# Altium PCB Led_Master.PcbDoc
Units mm, origin at the board's own origin, x right, y up, seen from the top; angles counter-clockwise.
Board outline 94.2 x 75.26 mm, 2 copper layers (Top Layer, Bottom Layer); 77 components, 42 nets, 241 pads, 41 vias.
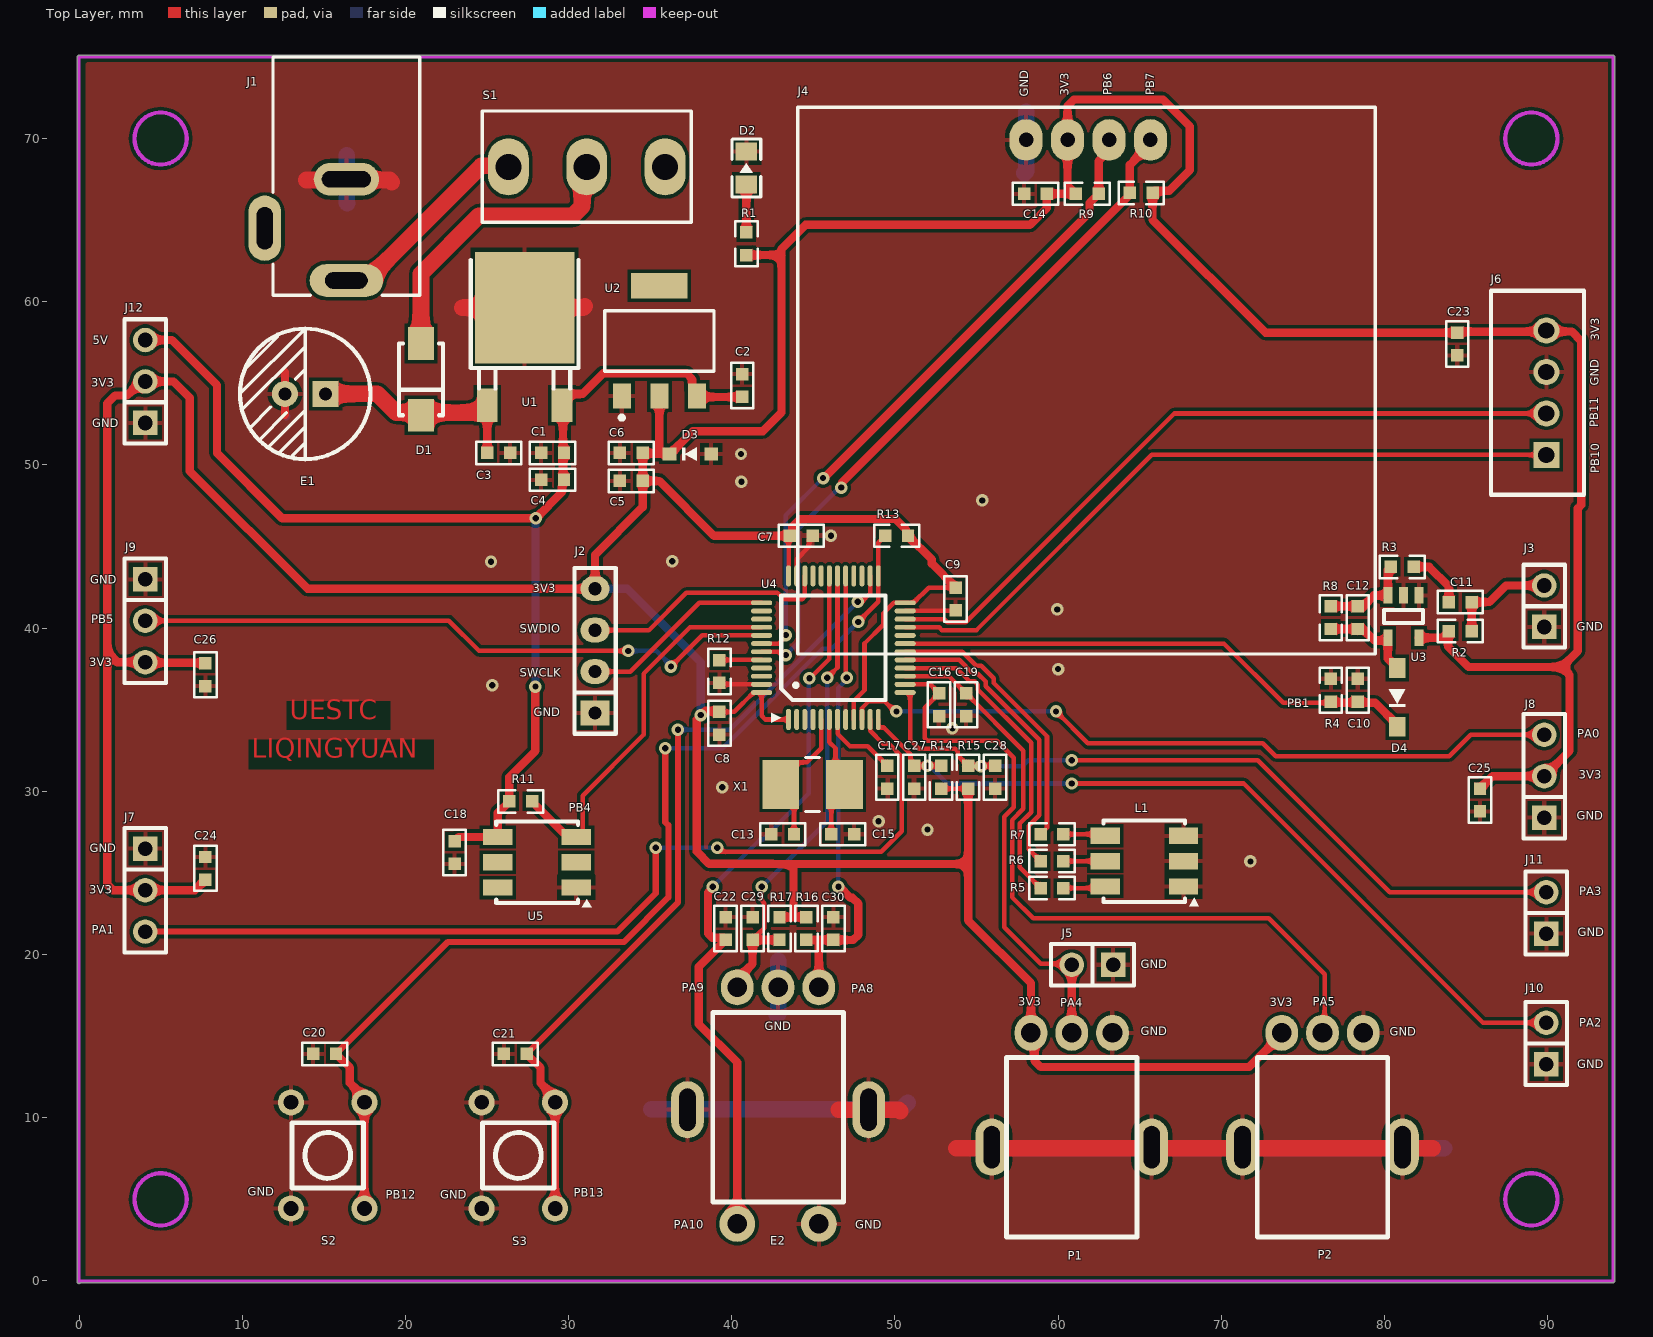
[diagram p0: Top Layer view]
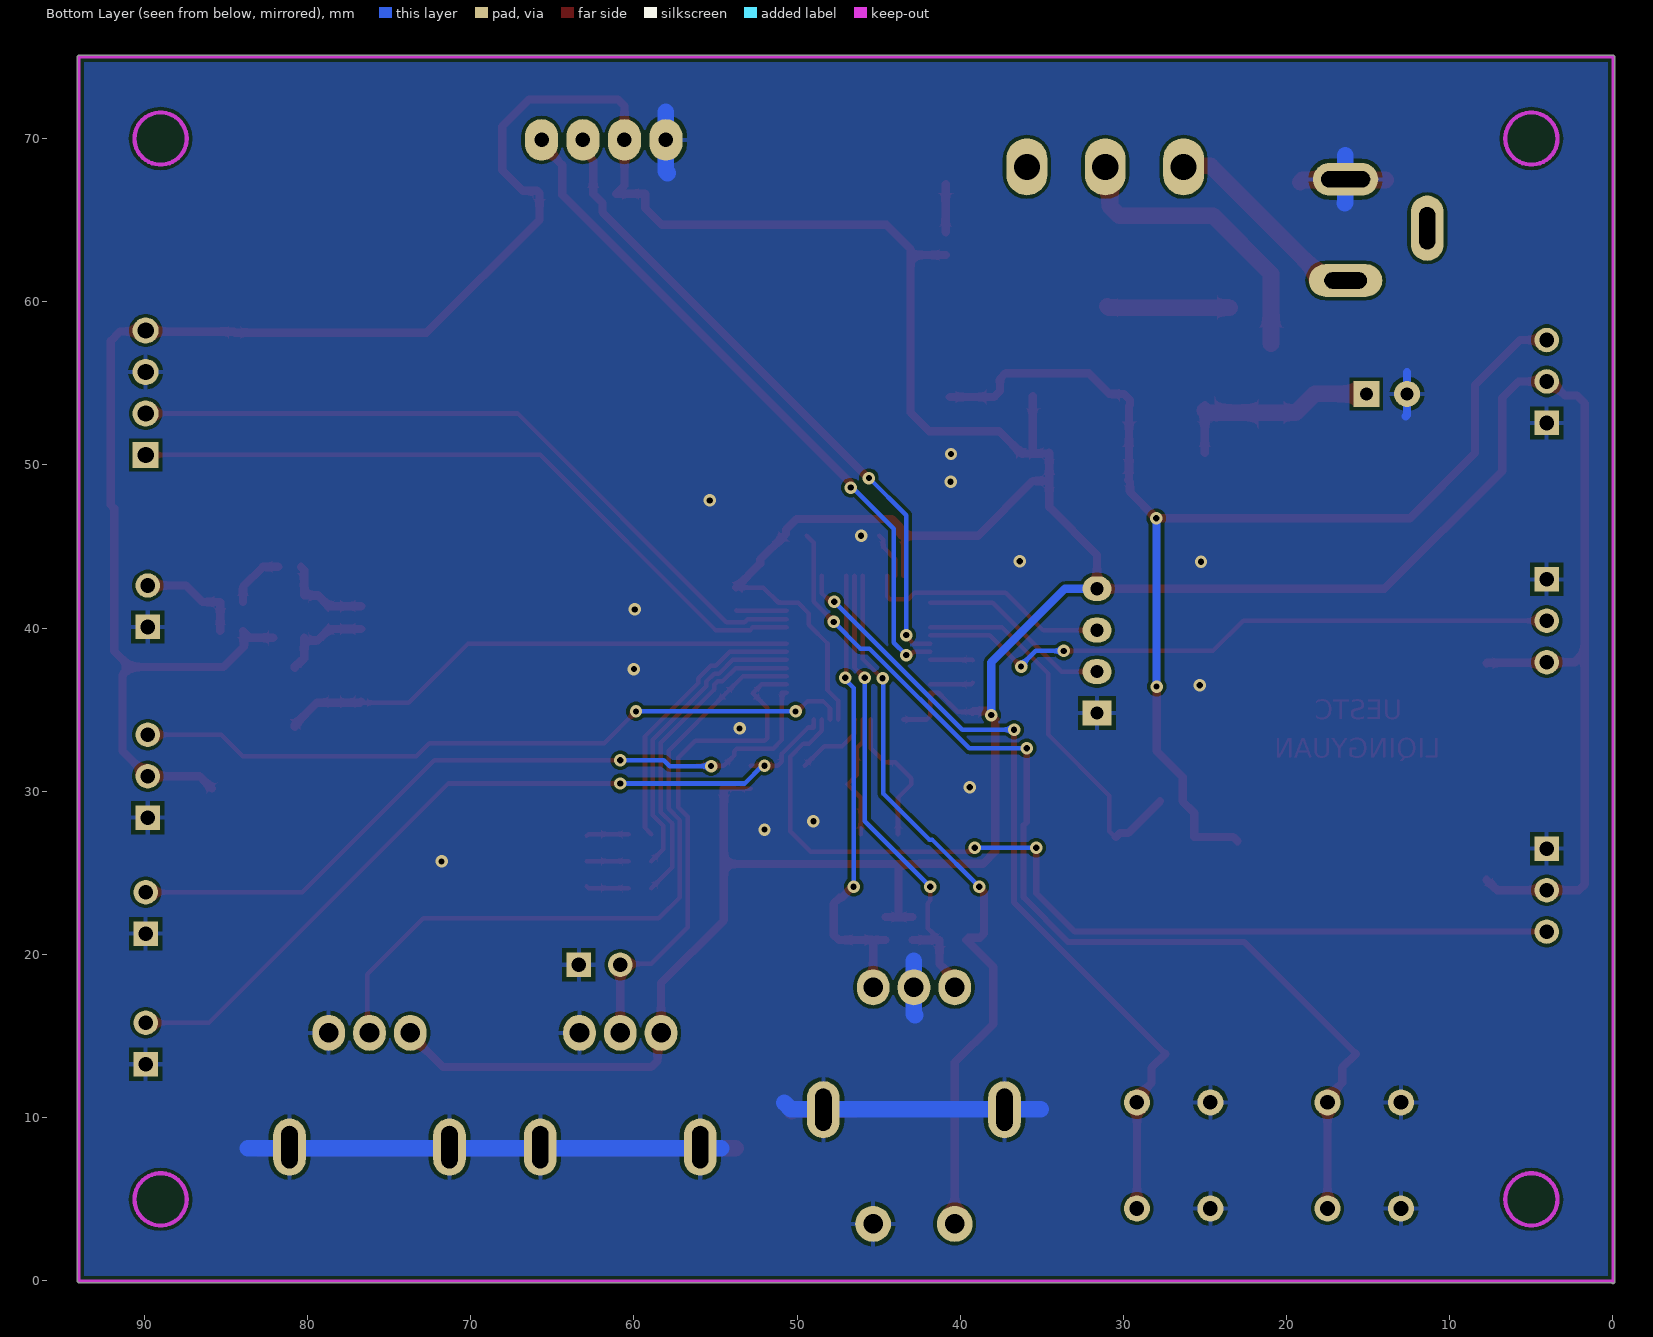
[diagram p1: Bottom Layer view, seen from below]
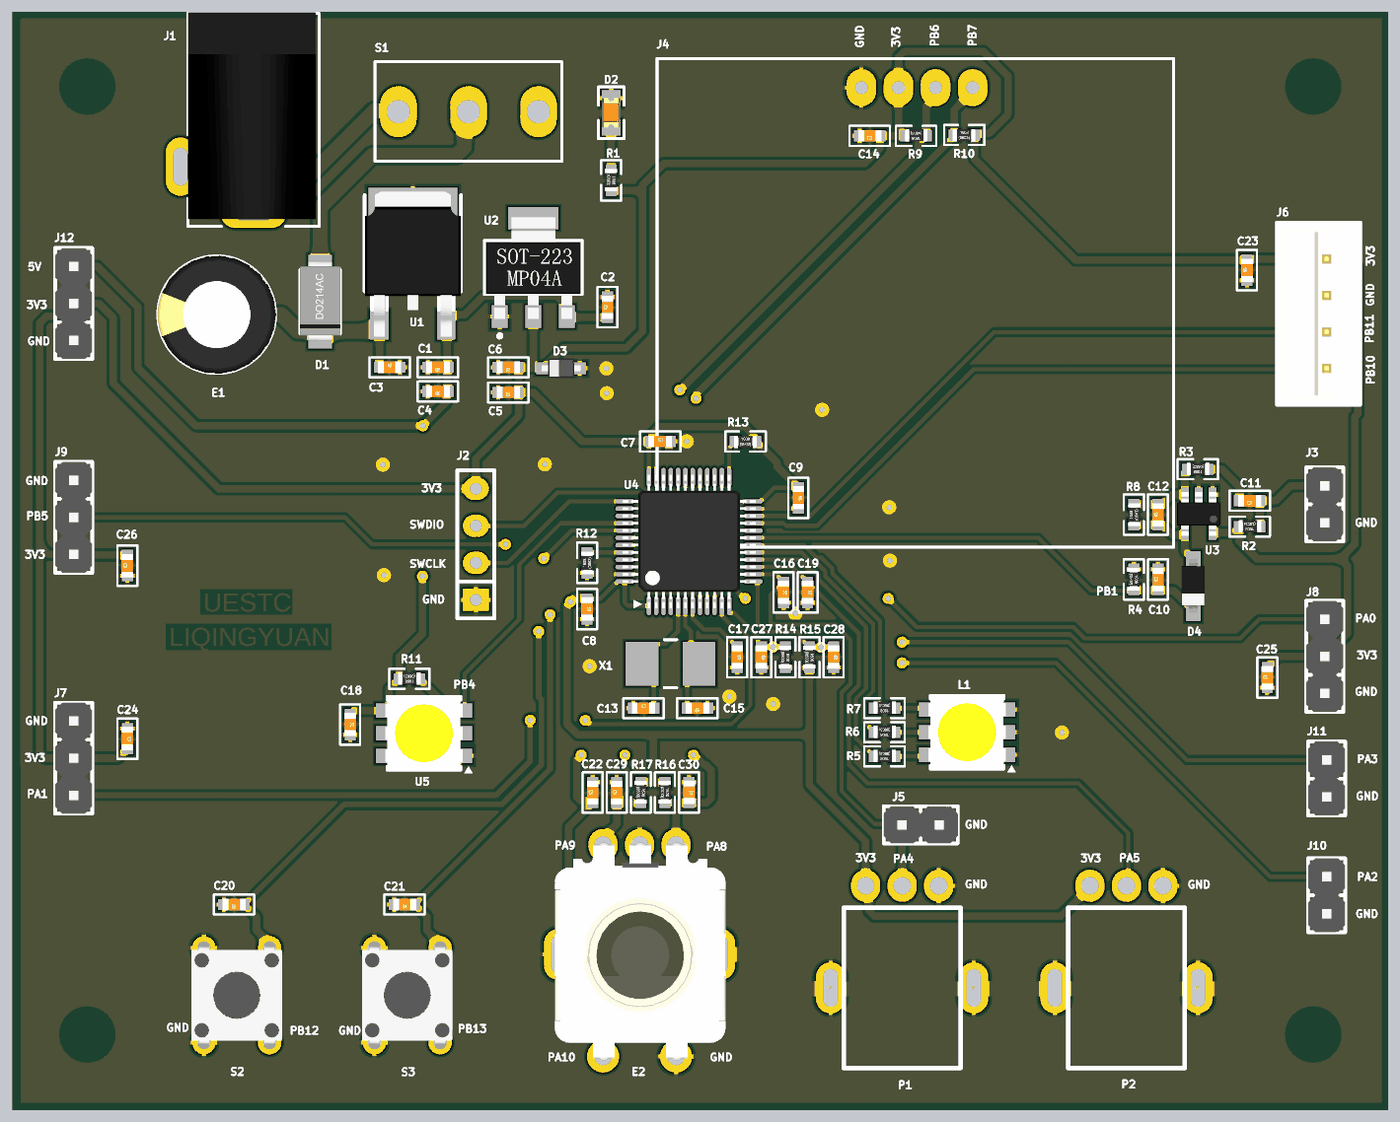
[diagram p2: 3D render of the assembled board from above, using the file's embedded part models]

## Layer stack, top to bottom
Top Solder: solder mask 0.0102, Solder Resist, Dk 3.5
Top Layer: signal copper 0.0356
Dielectric 1: dielectric 0.32, FR-4, Dk 4.8
Bottom Layer: signal copper 0.0356
Bottom Solder: solder mask 0.0102, Solder Resist, Dk 3.5

## Board outline
-0.102,-0.057 -0.102,74.943 -0.098,74.972 cw(c0,75) 0,75.102 94,75.102 cw(c94,75) 94.102,75 94.102,0 cw(c94,0) 94,-0.102 0.091,-0.102 cw(c0,-0.057)

## Design rules (kind name [scope] priority, off if disabled: settings)
Clearance Clearance_1 [All] p1: gap=0.203 ignorepadtopadclearanceinfootprint=FALSE
Clearance [InComponent('U4')] p2: gap=0.193 ignorepadtopadclearanceinfootprint=FALSE
HoleSize [All] p1: absolutevalues=TRUE maxlimit=3.81 minlimit=0.025 maxpercent=80.000 minpercent=20.000
PlaneConnect [All] p1: planeconnectstyle=Relief reliefexpansion=0.508 reliefentries=4 reliefconductorwidth=0.279 reliefairgap=0.254
PolygonConnect PolygonConnect_1 [IsVia] p1: connectstyle=Direct reliefconductorwidth=0.254 reliefentries=4 polygonreliefangle="90 Angle" airgapwidth=0.254
PolygonConnect [All] p2: connectstyle=Relief reliefconductorwidth=0.279 reliefentries=4 polygonreliefangle="90 Angle" airgapwidth=0.254
RoutingVias [All] p1: holewidth=0.381 width=0.762 viastyle="Through Hole" minholewidth=0.381 minwidth=0.762 maxholewidth=0.711 maxwidth=1.27
SilkToSilkClearance [All] p1: silktosilkclearance=0.152
SilkToSolderMaskClearance [IsPad] p1: minsilkscreentomaskgap=0.203 clearancetoexposedcopper=TRUE
SolderMaskExpansion [All] p1: expansion=0.102 istentingtop=FALSE
Width [All] p1: maxlimit=2.54 minlimit=0.254 preferedwidth=0.254
26 further rules are at their usual default settings.

## Components (designator, comment, footprint, x,y, rotation, side; value= is the part's Value field where it differs from the comment)
C1 "106" 0603C 29.718,50.743 r180 top value=10uF
C2 "104" 0603C 40.64,54.172 r90 top value=10nF
C3 "104" 0603c 25.019,50.743 r0 top
C4 "104" 0603C 29.718,49.092 r180 top value=10nF
C5 "106" 0603C 34.544,49.022 r180 top value=10uF
C6 "104" 0603C 34.544,50.743 r180 top value=10nF
C7 "104" 0603C 43.561,45.663 r0 top value=10nF
C8 "104" 0603C 39.243,34.868 r270 top value=10nF
C9 "104" 0603C 53.721,42.488 r270 top value=10nF
C10 "106" 0603C 78.359,35.503 r90 top value=10uF
C11 "106" 0603C 85.344,41.599 r180 top value=10uF
C12 "101" 0603c 78.359,39.948 r90 top
C13 "20P" 0603c 42.418,27.375 r0 top
C14 "104" 0603c 59.309,66.618 r180 top
C15 "20P" 0603c 47.498,27.375 r180 top
C16 "104" 0603c 52.705,36.011 r270 top
C17 "104" 0603c 49.53,31.566 r270 top
C18 "104" 0603C 23.012,26.949 r270 top value=10nF
C19 "104" 0603c 54.356,36.011 r270 top
C20 "103" 0603c 15.748,13.913 r180 top
C21 "103" 0603c 27.432,13.913 r180 top
C22 "103" 0603c 39.624,20.898 r90 top
C23 "104" 0603c 84.455,56.712 r90 top
C24 "104" 0603c 7.747,25.978 r270 top
C25 "104" 0603c 85.852,28.772 r90 top
C26 "104" 0603c 7.747,36.449 r90 top
C27 "104" 0603c 51.181,31.566 r270 top
C28 "104" 0603c 56.134,31.566 r270 top
C29 "103" 0603c 41.275,20.898 r90 top
C30 "103" 0603c 46.228,22.295 r270 top
D1 "M7" DO214_SMA 20.955,55.245 r90 top
D2 "LED0" LED_0805_R 40.894,68.199 r270 top
D3 "ESD5Z3.3" SOD323 37.465,50.673 r0 top
D4 "SS14" SOD123 80.772,35.757 r90 top
E1 "220u" CAP_PR_2.5_8 13.863,54.356 r180 top
E2 "EC11" SW_EC11 42.837,10.742 r180 top
J1 "PHONEJACK STEREO" 内径5.5插座 16.383,75.007 r0 top
J2 "CON4" SIP4 31.623,34.798 r90 top
J3 "CON2" SIP02 89.789,40.075 r90 top
J4 "CON4" "OLED 1.3寸屏" 58.039,69.92 r0 top
J5 "CON2" SIP02 63.373,19.374 r180 top
J6 "CON4" XH_2.54_4P 89.916,54.426 r90 top
J7 "CON3" SIP03 4.064,26.486 r270 top
J8 "CON3" SIP03 89.789,28.391 r90 top
J9 "CON3" SIP03 4.064,42.996 r270 top
J10 "CON2" SIP02 89.916,13.278 r90 top
J11 "CON2" SIP02 89.916,21.279 r90 top
J12 "CON3" SIP03 4.064,52.578 r90 top
L1 "RGB_LED" LED_5050 65.278,25.724 r0 top
P1 "20k" RV0932 60.833,8.198 r180 top
P2 "50k" RV0932 76.2,8.198 r180 top
R1 "1k" 0603r 40.894,64.262 r270 top
R2 "10k" 0603r 85.344,39.821 r180 top
R3 "2k" 0603r 81.788,43.758 r180 top
R4 "10k" 0603r 76.708,36.9 r270 top
R5 "820" 0603r 60.325,24.073 r180 top
R6 "1k8" 0603r 60.325,25.724 r180 top
R7 "2k2" 0603r 60.325,27.375 r180 top
R8 "100k" 0603r 76.708,39.948 r90 top
R9 "10k" 0603r 62.484,66.618 r180 top
R10 "10k" 0603r 64.389,66.675 r0 top
R11 "10k" 0603r 27.762,29.388 r180 top
R12 "10k" 0603r 39.243,36.646 r90 top
R13 "51k" 0603r 49.403,45.663 r0 top
R14 "10k" 0603r 52.832,31.566 r270 top
R15 "10k" 0603r 54.483,31.566 r270 top
R16 "51k" 0603r 44.577,22.295 r270 top
R17 "51k" 0603r 42.926,22.295 r270 top
S1 "SW SPDT" SS12D10直脚拨动开关 31.115,68.269 r0 top
S2 "SW-PB" SW_PB_6X6 15.24,7.69 r90 top
S3 "SW-PB" SW_PB_6X6 26.924,7.69 r90 top
U1 "78M05" TO-252AA 25.019,53.664 r0 top
U2 "AS1117" SOT223 35.56,57.601 r0 top
U3 "LMV321" SOT23_5 81.153,40.71 r90 top
U4 "stm32f103c8t6" LQFP_48_7X7 46.228,38.805 r0 top
U5 "WS2812B_5050RGB" LED_5050 28.067,25.654 r0 top
X1 "8M" CAPM5032X12N 44.958,30.423 r180 top

## Footprints (in the part's own frame and the unit in brackets; to place one, negate y for a bottom-side part, rotate by r counter-clockwise, add the part's x,y. Pads: shape width x height; smd on the part's side, far side on the other; paste and mask are expansions set on the pad)
0603C [mil]
  rect 30x30 smd: 1(0,0) 2(55,0)
  silkscreen extent -27,-27 82,27, body extent -4,-16 59,16, height 12
0603c [mil]
  rect 30x30 smd: 1(0,0) 2(55,0)
  silkscreen extent -27,-27 82,27, body extent -4,-16 59,16, height 12
0603r [mil]
  rect 30x30 smd: 1(0,0) 2(55,0)
  silkscreen extent -27,-27 82,27, body extent -4,-18 58,16, height 18
CAP_PR_2.5_8 [mm] "8X12"
  rect 1.6x1.6 hole 0.8: 1(-1.25,0)
  round 1.6 hole 0.8: 2(1.25,0)
  silkscreen extent -4,-4 4,4, body extent -4.08,-4.06 4.05,4.06, height 12.3
CAPM5032X12N [mm] "Molded Capacitor, 2-Leads, Body 5.0x3.2mm, IPC Medium Density"
  rect 2.25x3 smd: 1(-1.95,0) 2(1.95,0)
  silkscreen extent -0.43,-1.65 0.42,1.65, body extent -2.5,-1.6 2.5,1.6, height 1.2
DO214_SMA [mm]
  rect 2x1.6 smd: 1(2.2,0) 2(-2.2,0)
  silkscreen extent -2.2,-1.35 2.2,1.35, body extent -2.69,-1.4 2.8,1.39, height 2.32
LED_0805_R [mm]
  rect 1.1x1.3 smd: 1(-1,0) 2(1,0)
  silkscreen extent -1.78,-0.87 1.78,0.87, body extent -1.01,-0.63 1.01,0.63, height 1.1
LED_5050 [mm]
  rect 1.8x1 smd: 1(2.4,-1.55) 2(2.4,0) 3(2.4,1.55) 4(-2.4,1.55) 5(-2.4,0) 6(-2.4,-1.55)
  silkscreen extent -2.5,-2.75 3.35,2.5, body extent -2.65,-2.5 2.65,2.5, height 1.6
LQFP_48_7X7 [mm]
  oval 0.3x1.3 smd: 1(-2.75,-4.4) 2(-2.25,-4.4) 3(-1.75,-4.4) 4(-1.25,-4.4) 5(-0.75,-4.4) 6(-0.25,-4.4) 7(0.25,-4.4) 8(0.75,-4.4) 9(1.25,-4.4) 10(1.75,-4.4) 11(2.25,-4.4) 12(2.75,-4.4) 25(2.75,4.4) 26(2.25,4.4) 27(1.75,4.4) 28(1.25,4.4) 29(0.75,4.4) 30(0.25,4.4) 31(-0.25,4.4) 32(-0.75,4.4) 33(-1.25,4.4) 34(-1.75,4.4) 35(-2.25,4.4) 36(-2.75,4.4)
  oval 1.3x0.3 smd: 13(4.4,-2.75) 14(4.4,-2.25) 15(4.4,-1.75) 16(4.4,-1.25) 17(4.4,-0.75) 18(4.4,-0.25) 19(4.4,0.25) 20(4.4,0.75) 21(4.4,1.25) 22(4.4,1.75) 23(4.4,2.25) 24(4.4,2.75) 37(-4.4,2.75) 38(-4.4,2.25) 39(-4.4,1.75) 40(-4.4,1.25) 41(-4.4,0.75) 42(-4.4,0.25) 43(-4.4,-0.25) 44(-4.4,-0.75) 45(-4.4,-1.25) 46(-4.4,-1.75) 47(-4.4,-2.25) 48(-4.4,-2.75)
  silkscreen extent -3.8,-4.6 3.2,3.2, body extent -4.57,-4.57 4.57,4.57, height 1.62
"OLED 1.3寸屏" [mil] "OLED 1.3寸屏"
  oval 80x100 hole 35: 1(0,0) 2(100,0) 3(200,0) 4(300,0)
  silkscreen extent -551,-1240 843,79
RV0932 [mm] "立式电位器"
  oval 2x2.2 hole 1.2: 1(-2.5,-7) 2(0,-7) 3(2.5,-7)
  oval 2x3.5 hole 1 slot 2.6 at 90 deg: H1(-4.9,0) H2(4.9,0)
  silkscreen extent -4,-5.5 4,5.5
SIP02 [mm]
  rect 1.5x1.5 hole 0.9: 1(0,0)
  round 1.5 hole 0.9: 2(2.54,0)
  silkscreen extent -1.27,-1.27 3.81,1.27, body extent -1.27,-1.27 3.81,1.27, height 8.54
SIP03 [mm]
  rect 1.5x1.5 hole 0.9: 1(0,0)
  round 1.5 hole 0.9: 2(2.54,0) 3(5.08,0)
  silkscreen extent -1.27,-1.27 6.35,1.27, body extent -1.27,-1.27 6.35,1.27, height 8.54
SIP4 [mil] "单列直插4针"
  rect 60x70 hole 32: 1(0,0)
  oval 60x70 hole 32: 2(100,0) 3(200,0) 4(300,0)
  silkscreen extent -50,-50 350,50, body extent -55,-55 355,55, height 354
SOD123 [mm]
  rect 1.2x1 smd: 1(1.8,0) 2(-1.8,0)
  silkscreen extent -0.6,-0.5 0.5,0.5, body extent -1.85,-0.8 1.85,0.8, height 1.27
SOD323 [mm]
  rect 0.85x0.8 smd: 1(1.275,0) 2(-1.275,0)
  silkscreen extent -0.5,-0.4 0.4,0.4, body extent -1.35,-0.67 1.35,0.68, height 0.79
SOT23_5 [mm]
  rect 1x0.55 smd: 1(1.3,-0.95) 2(1.3,0) 3(1.3,0.95) 4(-1.3,0.95) 5(-1.3,-0.95)
  silkscreen extent -0.4,-1.21 0.4,1.19, body extent -1.52,-1.51 1.48,1.49, height 1.3
SOT223 [mm] "SOT-223/SC-73; 4 Leads; Body 6.7 x 7.3 mm, inc. leads (LxW max)"
  rect 1.1x1.55 smd: 1(-2.3,-3.375) 2(0,-3.375) 3(2.3,-3.375)
  rect 3.45x1.55 smd: 4(0,3.375)
  silkscreen extent -3.35,-4.82 3.35,1.85, body extent -3.25,-3.53 3.25,3.43, height 1.7
SS12D10直脚拨动开关 [mm] "SS12D10直脚拨动开关"
  oval 2.5x3.5 hole 1.6: 1(-4.8,0) 2(0,0) 3(4.8,0)
  silkscreen extent -6.4,-3.4 6.4,3.42
SW_EC11 [mm]
  oval 2x2.2 hole 1.2: 1(-2.5,-7.25) 2(0,-7.25) 3(2.5,-7.25)
  round 2.2 hole 1.2: 4(2.5,7.25) 5(-2.5,7.25)
  oval 2x3.5 hole 1 slot 2.6 at 90 deg: H1(-5.55,0.25) H2(5.55,0.25)
  silkscreen extent -4,-5.7 4,5.9, body extent -5.9,-7.42 5.81,7.53, height 24.5
SW_PB_6X6 [mm]
  round 1.6 hole 0.9: 1(-3.25,2.25) 1(3.25,2.25) 2(-3.25,-2.25) 2(3.25,-2.25)
  silkscreen extent -2,-2.2 2,2.2, body extent -3.96,-3.1 3.96,3.1, height 5.1
TO-252AA [mil]
  rect 50x80 smd: 1(0,0) 3(180,0)
  rect 240x270 smd: 2(90,235)
  silkscreen extent -40,40 220,350, body extent -39,-32 219,359, height 91
XH_2.54_4P [mm]
  rect 1.6x1.6 hole 1: 1(-3.81,0)
  round 1.6 hole 1: 2(-1.27,0) 3(1.27,0) 4(3.81,0)
  silkscreen extent -6.25,-2.3 6.25,3.4, body extent -6.25,-2.3 6.25,3.4, height 7
内径5.5插座 [mm] "内径5.5插座"
  oval 4.5x2 hole 1 slot 2.6 at 0 deg: 1(0,-13.7)
  oval 4x2 hole 1 slot 3 at 0 deg: 2(0,-7.5)
  oval 2x4 hole 1 slot 2.6 at 90 deg: 3(-5,-10.5)
  silkscreen extent -4.5,-14.6 4.5,0, body extent -4.49,-14.11 4.27,0.09, height 10.82

## Part data
C1 C5 C10 C11: library part "Cap Pol1", "Polarized Capacitor (Radial)", Published=8-Jun-2000, Publisher="Altium Limited", Revision="July-2002: Re-released for DXP Platform."
C2 C4 C6 C7 C8 C9 C18: library part Cap, "Capacitor", Published=8-Jun-2000, Publisher="Altium Limited", Revision="July-2002: Re-released for DXP Platform."
C3 C14 C16 C19 C20 C21 C22 C27 C28 C29 C30: library part Pro14.tmp_104_7
C12 C17 C23 C24 C25 C26: library part CAP, "Capacitor"
C13 C15: library part Pro87.tmp_22p_18
D1 D4: library part DIODE, "Diode"
D2: "Typical INFRARED GaAs LED", LatestRevisionDate=08-Jul-2005, LatestRevisionNote="Mech Layer 1 removed.", PackageReference=LED-0, Published=8-Jun-2000, Publisher="Altium Limited"
D3: library part ZENER2, "Zener Diode"
E1: library part Pro87.tmp_47u_10
E2: library part EC11编码开关, "EC11编码开关"
J2 J3 J4 J5 J6 J7 J8 J9 J10 J11 J12: "Connector"
P1 P2: library part POT2, "Potentiometer"
R1 R2 R3 R4 R5 R6 R7 R8 R9 R10 R11 R12 R13 R14 R15 R16 R17: library part RES2
U1: library part LP2950CDT-5.0, "Series of Adjustable Micropower Voltage Regulators", DigiKeyPartNumber=LP2950CDT-5.0NS-ND, Manufacturer="National Semiconductor", PackageTopMarking=NSUZXYTT*LP2950*CDT-5.0, PowerWise=N, Code_JEDEC=TO-252-AA, ComponentLink1Description="LP2950 Datasheet", ComponentLink1URL=http://www.national.com/ds/LP/LP2950.pdf, ComponentLink2Description="LP2950 Web Page", ComponentLink2URL=http://www.national.com/pf/LP/LP2950.html, ComponentLink3Description="TD03B Package Page", ComponentLink3URL=http://www.national.com/packaging/folders/td03b.html, CompType="LDO IC", DatasheetVersion=May-2005, PackageDescription="TO252, Molded, Jedec, 6.8 x 6.10 x 2.30mm Body, 3 Lead, 2.28mm Pitch, Surface Mount", PackageReference=TD03B, PackageVersion="revC, Apr-2003", PartNumber=LP2950CDT-5.0, PinCount=3, Published=4-Dec-2008, Publisher="Altium Limited", RoHS=O
U2: library part VOLTREG1
U3: library part OPAMP, "Operational Amplifier"
U4: library part stm32f103_48p
X1: library part Pro87.tmp_8M_17

## Via types
v1: diameter 0.762, hole 0.381, Top Layer to Bottom Layer, 41 vias

## Nets (pads, with @x,y where several pads share a name; then routed paths per layer and width w, separated by ;. In a path a pad name is that pad's centre, name@x,y a point inside that pad or via, vN(x,y) a via of type N, cw(c..) or ccw(c..) an arc to the next point about the centre after c; other vN are vias at no path point)
+3V3: C5.1 C6.1 C7.1 C8.1 C9.1 C14.1 C23.2 C24.2 C25.2 C26.2 D3.2 J2.4 J4.2 J6.4 J7.2 J8.2 J9.3 J12.2 P1.3 P2.3 R1.2 R2.2 R9.2 R10.2 R13.2 R14.2 R15.2 R16.1 R17.1 U2.2 U3.5 U4.1 U4.9 U4.24 U4.36 U4.48 | length 352.5
  Top Layer w0.279: C8.1 40.141,34.868 41.328,36.055 U4.48 41.828,34.626 42.049,34.405 U4.1 ; U4.36 43.482,43.209 43.482,45.584 C7.1 ; U4.9 47.478,35.54 48.133,36.195 48.133,39.06 49.276,40.203 49.276,40.9 49.924,41.548 50.106,41.548 50.109,41.551 50.624,41.551 U4.24 51.128,41.555 52.061,42.488 C9.1 ; R14.2 R15.2
  Top Layer w0.508: C24.2 7.112,23.946 J7.2 2.089,23.946 1.727,24.308 1.727,38.532 ; C26.2 7.712,37.881 4.099,37.881 J9.3 2.343,37.916 1.727,38.532 ; U2.2 35.56,50.901 35.367,50.708 ; C8.1 39.186,34.925 38.354,34.925 v1(38.1,34.671) 38.1,34.641 37.859,34.4 37.859,26.32 38.615,25.564 42.52,25.564 42.531,25.552 43.492,25.552 ; R1.2 43.053,62.865 ; R17.1 43.758,22.295 ; R16.1 43.758,22.295 ; C9.1 52.261,43.948 52.261,44.202 R13.2 50.673,45.79 50.673,46.05 50.038,46.685 44.189,46.685 43.688,46.184 43.688,45.79 C7.1 38.919,45.663 35.56,49.022 C5.1 ; R15.2 54.483,25.552 ; P2.3 73.7,15.098 71.708,13.106 58.928,13.106 58.547,13.487 58.547,14.984 P1.3 58.333,18.248 54.483,22.098 54.483,25.552 ; U3.5 83.536,39.41 R2.2@83.896,39.77 ; R2.2 R2.2@83.896,39.77 ; C25.2 86.614,30.931 J8.2 91.338,32.48 91.338,37.135 90.856,37.617 ; 1.727,38.532 1.727,53.772 2.213,54.258 2.936,54.258 3.796,55.118 J12.2 5.791,55.118 6.782,54.127 6.782,49.632 13.995,42.418 J2.4 31.623,44.494 34.544,47.415 C5.1 ; C5.1 C6.1 34.579,50.708 35.367,50.708 ; 35.367,50.708 36.155,50.708 D3.2 36.215,50.673 37.612,52.07 41.91,52.07 43.053,53.213 43.053,62.865 ; 43.053,62.865 43.053,63.246 44.52,64.713 58.269,64.713 59.309,65.753 C14.1 R9.2 60.579,67.126 J4.2 60.579,72.009 60.96,72.39 66.421,72.39 68.072,70.739 68.072,68.072 66.802,66.802 65.913,66.802 R10.2 65.786,65.024 72.701,58.109 C23.2 84.519,58.172 89.852,58.172 J6.4 89.973,58.179 91.478,58.179 92.05,57.607 92.05,47.549 91.846,47.346 91.846,38.608 90.856,37.617 ; 43.492,25.552 43.778,25.266 43.778,22.315 43.758,22.295 ; 43.492,25.552 54.483,25.552 ; R2.2@83.896,39.77 83.896,38.862 85.141,37.617 90.856,37.617
  Bottom Layer w0.508: J2.4 33.579,42.418 38.1,37.897 v1(38.1,34.671)
+5: C1.1 C2.1 C4.1 C18.1 J12.3 R11.2 U1.3 U2.3 U5.4 | length 74.9
  Top Layer w0.508: J12.3 5.69,57.658 8.458,54.889 8.458,50.724 12.446,46.736 v1(27.991,46.736) 29.591,48.336 29.591,48.965 C4.1 29.654,49.155 29.654,53.6 U1.3 29.591,53.975 29.972,54.356 30.861,54.356 32.131,55.626 37.211,55.626 37.564,55.273 37.564,54.522 U2.3 37.914,54.172 C2.1 ; C18.1 23.267,27.204 U5.4 25.667,28.69 R11.2 26.365,30.882 27.965,32.483 v1(27.965,36.424)
  Bottom Layer w0.508: v1(27.965,36.424) 27.978,36.436 27.978,46.723 v1(27.991,46.736)
BOOT0: R12.2 U4.44 | length 2.6
  Top Layer w0.279: R12.2 39.255,38.055 U4.44
GND: C1.2 C2.2 C3.2 C4.2 C5.2 C6.2 C7.2 C8.2 C9.2 C10.2 C13.1 C14.2 C15.1 C16.2 C17.2 C18.2 C19.2 C20.2 C21.2 C22.2 C23.1 C24.1 C25.1 C26.1 C27.2 C28.2 C29.2 C30.1 D2.1 D3.1 E1.2 E2.2 E2.5 E2.H1 E2.H2 J1.2 J2.1 J3.1 J4.1 J5.1 J6.3 J7.1 J8.1 J9.1 J10.1 J11.1 J12.1 L1.1 L1.2 L1.3 P1.1 P1.H1 P1.H2 P2.1 P2.H1 P2.H2 R4.1 R12.1 S2.1 S3.1 U1.2 U2.1 U3.1 U3.2 U4.8 U4.23 U4.35 U4.47 U5.1 | length 114.6
  Top Layer w0.279: R12.1 39.334,36.555 U4.47 ; U4.35 43.978,44.232 44.717,44.971 44.717,45.422 C7.2 ; U4.23 50.632,41.059 53.689,41.059 C9.2
  Top Layer w0.508: 12.624,53.086 12.624,55.677
  Top Layer w1.016: 13.919,67.462 19.025,67.462 19.152,67.335 ; 23.495,59.639 30.912,59.639 30.988,59.715 ; 46.558,10.49 50.216,10.49 50.317,10.389 ; 53.772,8.128 82.956,8.128
  Bottom Layer w0.508: 12.624,55.677 12.624,53.061 12.7,52.984
  Bottom Layer w1.016: 16.408,68.986 16.408,66.065 16.434,66.04 ; 35.077,10.516 50.368,10.516 50.775,10.922 ; 42.774,16.281 42.85,16.358 42.85,19.609 ; 54.661,8.128 83.642,8.128 ; 57.937,67.894 58.039,67.996 J4.1 58.039,71.628
  other v1: 71.78,25.705 51.994,27.661 48.997,28.169 39.421,30.251 53.518,33.858 25.324,36.5 59.995,37.49 59.944,41.148 25.248,44.069 36.347,44.094 46.076,45.669 55.347,47.828 40.589,48.971 40.564,50.673
NetC11_1: C11.1 J3.2 R2.1 | length 6.6
  Top Layer w0.508: R2.1 C11.1 86.43,41.599 87.446,42.615 J3.2
NetC11_2: C11.2 R3.1 | length 3.6
  Top Layer w0.508: R3.1 82.734,43.758 83.947,42.545 C11.2
NetC12_1: C12.1 D4.1 R8.1 U3.4 | length 5.9
  Top Layer w0.508: R8.1 C12.1 78.67,39.948 79.375,39.243 80.182,39.243 U3.4@80.203,39.264 ; U3.4 U3.4@80.203,39.264 ; D4.1 80.772,37.682 80.651,37.803 80.548,37.803 80.203,38.148 U3.4@80.203,39.264
NetC12_2: C12.2 R3.2 R8.2 U3.3 | length 5.6
  Top Layer w0.508: R8.2 C12.2 78.683,41.345 79.348,42.01 U3.3 80.203,43.57 R3.2
NetC13_2: C13.2 U4.5 X1.2 | length 8.7
  Top Layer w0.279: C13.2 43.815,29.616 X1.2 43.008,30.798 43.993,31.783 44.61,31.783 45.478,32.651 U4.5
NetC15_2: C15.2 U4.6 X1.1 | length 7.7
  Top Layer w0.279: U4.6 45.978,33.016 46.355,32.639 46.355,30.976 X1.1 46.101,29.616 C15.2
NetD1_1: D1.1 S1.2 | length 18.9
  Top Layer w1.016: D1.1 20.955,61.722 24.511,65.278 30.266,65.278 30.831,65.843 30.831,67.985 S1.2 S1.2@31.115,67.769
NetD2_1: D2.2 R1.1 | length 2.9
  Top Layer w0.508: R1.1 D2.2
NetJ1_1: J1.1 S1.1 | length 12.9
  Top Layer w1.016: J1.1 17.633,61.307 24.652,68.326 26.258,68.326 S1.1
NetL1_4: L1.4 R7.1 | length 2.6
  Top Layer w0.279: R7.1 62.777,27.375 L1.4
NetL1_5: L1.5 R6.1 | length 2.6
  Top Layer w0.279: R6.1 L1.5
NetL1_6: L1.6 R5.1 | length 2.6
  Top Layer w0.279: R5.1 62.777,24.073 L1.6
NRST: C17.1 U4.7 | length 4.7
  Top Layer w0.279: U4.7 46.482,34.401 46.482,33.528 47.244,32.766 48.33,32.766 C17.1
PA0: J8.3 U4.10 | length 44.6
  Top Layer w0.279: U4.10 47.982,34.409 47.982,35.106 48.411,35.535 49.352,35.535 49.86,35.027 v1@49.86,34.823 ; v1(59.868,34.9) 61.824,32.944 72.542,32.944 73.33,32.156 83.972,32.156 85.287,33.471 J8.3
  Bottom Layer w0.279: v1(50.089,34.9) v1(59.868,34.9)
PA1: J7.3 U4.11 | length 58.6
  Top Layer w0.279: v1(39.116,26.543) 39.37,26.289 49.149,26.289 50.419,27.559 50.419,32.131 49.633,32.917 49.268,32.917 48.482,33.704 48.482,34.401 U4.11
  Top Layer w0.381: J7.3 32.988,21.406 35.344,23.762 v1(35.344,26.543)
  Bottom Layer w0.279: v1(35.344,26.543) v1(39.116,26.543)
PA2: C27.1 J10.2 R14.1 U4.12 | length 50.1
  Top Layer w0.279: U4.12 48.978,33.911 48.988,33.901 49.331,33.901 50.94,32.293 50.94,31.807 C27.1 R14.1 ; v1(60.833,30.48) 71.374,30.48 86.036,15.818 J10.2
  Bottom Layer w0.279: v1(51.994,31.572) 52.121,31.572 53.214,30.48 v1(60.833,30.48)
PA3: C28.1 J11.2 R15.1 U4.13 | length 47.4
  Top Layer w0.279: U4.13 50.917,36.055 50.927,36.045 50.927,33.147 51.46,32.614 53.684,32.614 53.848,32.45 53.848,32.201 R15.1 55.27,31.566 C28.1 ; v1(60.833,31.902) 72.238,31.902 80.321,23.819 J11.2
  Bottom Layer w0.279: v1(55.27,31.547) 57.806,31.547 58.161,31.902 v1(60.833,31.902)
PA4: C16.1 J5.2 P1.2 U4.14 | length 31.3
  Top Layer w0.279: U4.14 52.161,36.555 C16.1 51.816,35.122 51.816,33.26 51.98,33.096 56.236,33.096 57.277,32.055 57.277,29.018 56.693,28.434 56.693,21.666 58.928,19.431 60.776,19.431 J5.2
  Top Layer w0.508: P1.2 J5.2
PA5: C19.1 P2.2 U4.15 | length 43.2
  Top Layer w0.279: U4.15 53.312,37.055 C19.1 57.867,32.5 57.867,28.926 57.175,28.234 57.175,23.517 58.467,22.225 72.898,22.225 76.327,18.796 76.327,15.325 P2.2
PA6: R5.2 U4.16 | length 19.5
  Top Layer w0.279: U4.16 53.765,37.555 54.585,36.735 54.879,36.735 55.08,36.534 55.08,36.24 58.35,32.97 58.35,28.726 57.658,28.034 57.658,25.343 R5.2
PA7: R6.2 U4.17 | length 18.4
  Top Layer w0.279: U4.17 53.947,38.055 54.785,37.217 55.079,37.217 55.562,36.734 55.562,36.44 58.833,33.17 58.833,28.527 58.204,27.898 58.204,26.448 R6.2
PA8: C30.2 E2.1 R16.2 U4.29 | length 28.7
  Top Layer w0.279: v1@46.978,37.326 U4.29
  Top Layer w0.508: R16.2 45.212,20.898 ; E2.1 45.337,20.773 45.212,20.898 ; v1(46.533,24.155) 46.602,24.155 47.284,23.473 47.393,23.473 47.752,23.114 47.752,21.209 47.441,20.898 C30.2 45.212,20.898
  Bottom Layer w0.279: v1(46.533,24.155) 46.533,36.333 47.041,36.841 v1(47.041,36.957)
PA9: C29.1 E2.3 R17.2 U4.30 | length 29.5
  Top Layer w0.279: C29.1 41.999,21.622 41.999,23.152 41.834,23.317 v1(41.834,24.155) ; v1(45.847,36.957) 46.478,37.588 U4.30
  Top Layer w0.508: E2.3 40.337,18.496 41.275,19.434 C29.1 R17.2
  Bottom Layer w0.279: v1(41.834,24.155) 45.847,28.169 v1(45.847,36.957)
PA10: C22.1 E2.4 U4.31 | length 45.4
  Top Layer w0.279: v1(44.755,36.932) 44.798,36.932 45.978,38.112 U4.31
  Top Layer w0.508: v1(38.837,24.155) 38.837,24.105 38.538,23.806 38.538,21.292 38.805,21.025 39.497,21.025 C22.1 37.973,19.247 37.973,15.748 40.337,13.384 E2.4
  Bottom Layer w0.279: v1(38.837,24.155) 41.728,27.046 41.905,27.046 44.704,29.845 44.704,36.881 v1(44.755,36.932)
PB0: R7.2 U4.18 | length 17.2
  Top Layer w0.279: U4.18 54.13,38.555 54.985,37.7 55.279,37.7 56.045,36.934 56.045,36.639 59.315,33.369 59.315,27.762 R7.2
PB1: C10.1 D4.2 R4.2 U4.19 | length 32.4
  Top Layer w0.279: U4.19 70.165,39.055 73.787,35.433 76.638,35.433 R4.2
  Top Layer w0.508: R4.2 76.778,35.433 79.421,35.433 80.772,34.082 D4.2
PB4: R11.1 U4.40 U5.3 | length 23.8
  Top Layer w0.279: U5.3 30.507,27.204 30.867,27.564 30.867,29.734 34.595,33.462 34.595,37.211 37.439,40.055 U4.40
  Top Layer w0.508: R11.1 29.7,27.45 30.221,27.45 U5.3
PB5: J9.2 U4.41 | length 39.8
  Top Layer w0.279: J9.2 22.663,40.456 24.511,38.608 v1(33.655,38.608) ; v1(36.271,37.643) 38.183,39.555 U4.41
  Bottom Layer w0.279: v1(33.655,38.608) 35.382,38.608 36.271,37.719 v1(36.271,37.643)
PB10: J6.1 U4.21 | length 43.8
  Top Layer w0.279: U4.21 52.705,40.055 52.876,39.884 54.997,39.884 65.729,50.616 J6.1
PB11: J6.2 U4.22 | length 44.7
  Top Layer w0.279: U4.22 53.01,40.555 53.198,40.367 54.337,40.367 67.126,53.156 J6.2
PB12: C20.1 R13.1 S2.2 U4.25 | length 64.7
  Top Layer w0.279: v1(47.752,40.386) 48.978,41.612 U4.25 48.978,45.238 R13.1
  Top Layer w0.381: C20.1 22.612,20.777 33.398,20.777 36.119,23.498 36.119,27.922 35.928,28.112 v1(35.928,32.639)
  Top Layer w0.508: C20.1 16.593,13.068 16.593,12.132 17.49,11.235 17.49,10.94 S2.2@17.49,4.44
  Bottom Layer w0.279: v1(35.928,32.639) 39.453,32.639 45.566,38.752 46.118,38.752 v1(47.752,40.386)
PB13: C21.1 S3.2 U4.26 | length 50.2
  Top Layer w0.279: v1(47.717,41.621) 47.971,41.621 48.474,42.124 48.474,43.201 U4.26
  Top Layer w0.381: C21.1 36.703,23.184 v1(36.703,33.782)
  Top Layer w0.508: C21.1 28.277,13.068 28.277,12.132 29.174,11.235 29.174,10.94 S3.2@29.174,4.44
  Bottom Layer w0.279: v1(36.703,33.782) 39.878,33.782 v1(47.717,41.621)
PB15: U4.28
SCL: J4.3 R9.1 U4.42 | length 40.3
  Top Layer w0.279: U4.42 42.865,39.055 43.307,39.497 v1(43.307,39.573)
  Top Layer w0.508: v1@45.618,49.174 61.925,65.481 61.925,66.059 R9.1 62.484,68.619 63.119,69.254 J4.3
  Bottom Layer w0.279: v1(43.307,39.573) 43.307,46.914 v1(45.593,49.2)
SDA: J4.4 R10.1 U4.43 | length 42.4
  Top Layer w0.279: U4.43 42.852,38.555 v1@43.18,38.227 ; J4.4@65.659,69.666 J4.4
  Top Layer w0.508: v1(46.711,48.616) 46.759,48.664 46.759,48.934 64.389,66.564 64.389,68.396 J4.4@65.659,69.666
  Bottom Layer w0.279: v1(43.307,38.354) 44.069,39.116 44.069,46.101 46.584,48.616 v1(46.711,48.616)
SWCLK: J2.2 U4.37 | length 12
  Top Layer w0.279: J2.2 33.782,37.338 37.999,41.555 U4.37
SWDIO: J2.3 U4.34 | length 15.3
  Top Layer w0.279: J2.3 34.925,39.878 37.211,42.164 42.799,42.164 43.18,41.783 44.314,41.783 44.478,41.947 U4.34
VCC: C3.1 D1.2 E1.1 U1.1 | length 13.4
  Top Layer w0.508: C3.1 25.019,53.34 U1.1
  Top Layer w1.016: E1.1 18.288,54.356 19.431,53.213 24.892,53.213 U1.1@25.019,53.34
pads on no net: J1.3 S1.3 U2.4 U4.2 U4.3 U4.4 U4.20 U4.27 U4.32 U4.33 U4.38 U4.39 U4.45 U4.46 U5.2 U5.5 U5.6

## Polygon pours and split planes (outlines as drawn)
GND on Top Layer "NONET_L-01_P-001" (solid, remove dead copper, pour order 0): 0.554,75.155 0.58,75.18 94.433,75.18 94.433,0.25 94.407,0.225 0.427,0.225 0.402,75.155 0.427,75.18
GND on Bottom Layer "NONET_L-01_P-001" (solid, remove dead copper, pour order 1): 0.118,74.872 0.22,74.974 93.87,74.974 93.87,0.45 93.463,0.044 0.194,0.044 0.194,74.872

## Keep-outs
Keep-Out Layer:
  circle w0.254: c89,5 r1.6
  circle w0.254: c5,5 r1.6
  circle w0.254: c89,70 r1.6
  circle w0.254: c5,70 r1.6
  lines w0.203: 0,-0.057 0,74.943 ; 0,0 94,0 94,75 0,75

## Other copper
Top Layer:
  text "UESTC" at 12.929,34.008 h2.03
  text "LIQINGYUAN" at 10.592,31.648 h2.03

## Silkscreen, mask and mechanical layers (free items; w line width, h text height)
Top Overlay:
  text "PB6" at 63.297,72.669 h0.51 r90
  text "PB7" at 65.888,72.669 h0.51 r90
  text "3V3" at 60.655,72.619 h0.51 r90
  text "GND" at 58.166,72.568 h0.51 r90
  text "3V3" at 93.167,57.607 h0.51 r90
  text "5V" at 0.838,57.404 h0.51
  text "GND" at 93.142,54.864 h0.51 r90
  text "3V3" at 0.762,54.788 h0.51
  text "PB11" at 93.091,52.324 h0.51 r90
  text "GND" at 0.813,52.299 h0.51
  text "PB10" at 93.167,49.505 h0.51 r90
  text "GND" at 0.686,42.723 h0.51
  text "3V3" at 27.813,42.215 h0.51
  text "PB5" at 0.737,40.31 h0.51
  text "GND" at 91.77,39.853 h0.51
  text "SWDIO" at 27,39.726 h0.51
  text "3V3" at 0.635,37.668 h0.51
  text "SWCLK" at 27,37.033 h0.51
  text "PB1" at 74.041,35.154 h0.51
  text "GND" at 27.864,34.595 h0.51
  text "PA0" at 91.796,33.299 h0.51
  text "3V3" at 91.897,30.759 h0.51
  text "PB4" at 29.997,28.753 h0.51
  text "GND" at 91.77,28.27 h0.51
  text "GND" at 0.66,26.264 h0.51
  text "3V3" at 0.635,23.724 h0.51
  text "PA3" at 91.923,23.647 h0.51
  text "PA1" at 0.787,21.26 h0.51
  text "GND" at 91.846,21.107 h0.51
  text "GND" at 65.049,19.152 h0.51
  text "PA9" at 36.932,17.729 h0.51
  text "PA8" at 47.32,17.653 h0.51
  text "3V3" at 57.556,16.866 h0.51
  text "PA5" at 75.616,16.866 h0.51
  text "3V3" at 72.974,16.84 h0.51
  text "PA4" at 60.122,16.815 h0.51
  text "PA2" at 91.923,15.57 h0.51
  text "GND" at 42.012,15.367 h0.51
  text "GND" at 65.049,15.062 h0.51
  text "GND" at 80.315,15.037 h0.51
  text "GND" at 91.821,13.03 h0.51
  text "GND" at 10.338,5.232 h0.51
  text "PB13" at 30.302,5.156 h0.51
  text "PB12" at 18.796,5.029 h0.51
  text "GND" at 22.123,5.029 h0.51
  text "PA10" at 36.449,3.2 h0.51
  text "GND" at 47.574,3.2 h0.51